# Altium PCB pcb.PcbDoc
Units mm, origin at the board's own origin, x right, y up, seen from the top; angles counter-clockwise.
Board outline 42.29 x 42.42 mm, 2 copper layers (Top Layer, Bottom Layer); 59 components, 70 nets, 242 pads, 112 vias.
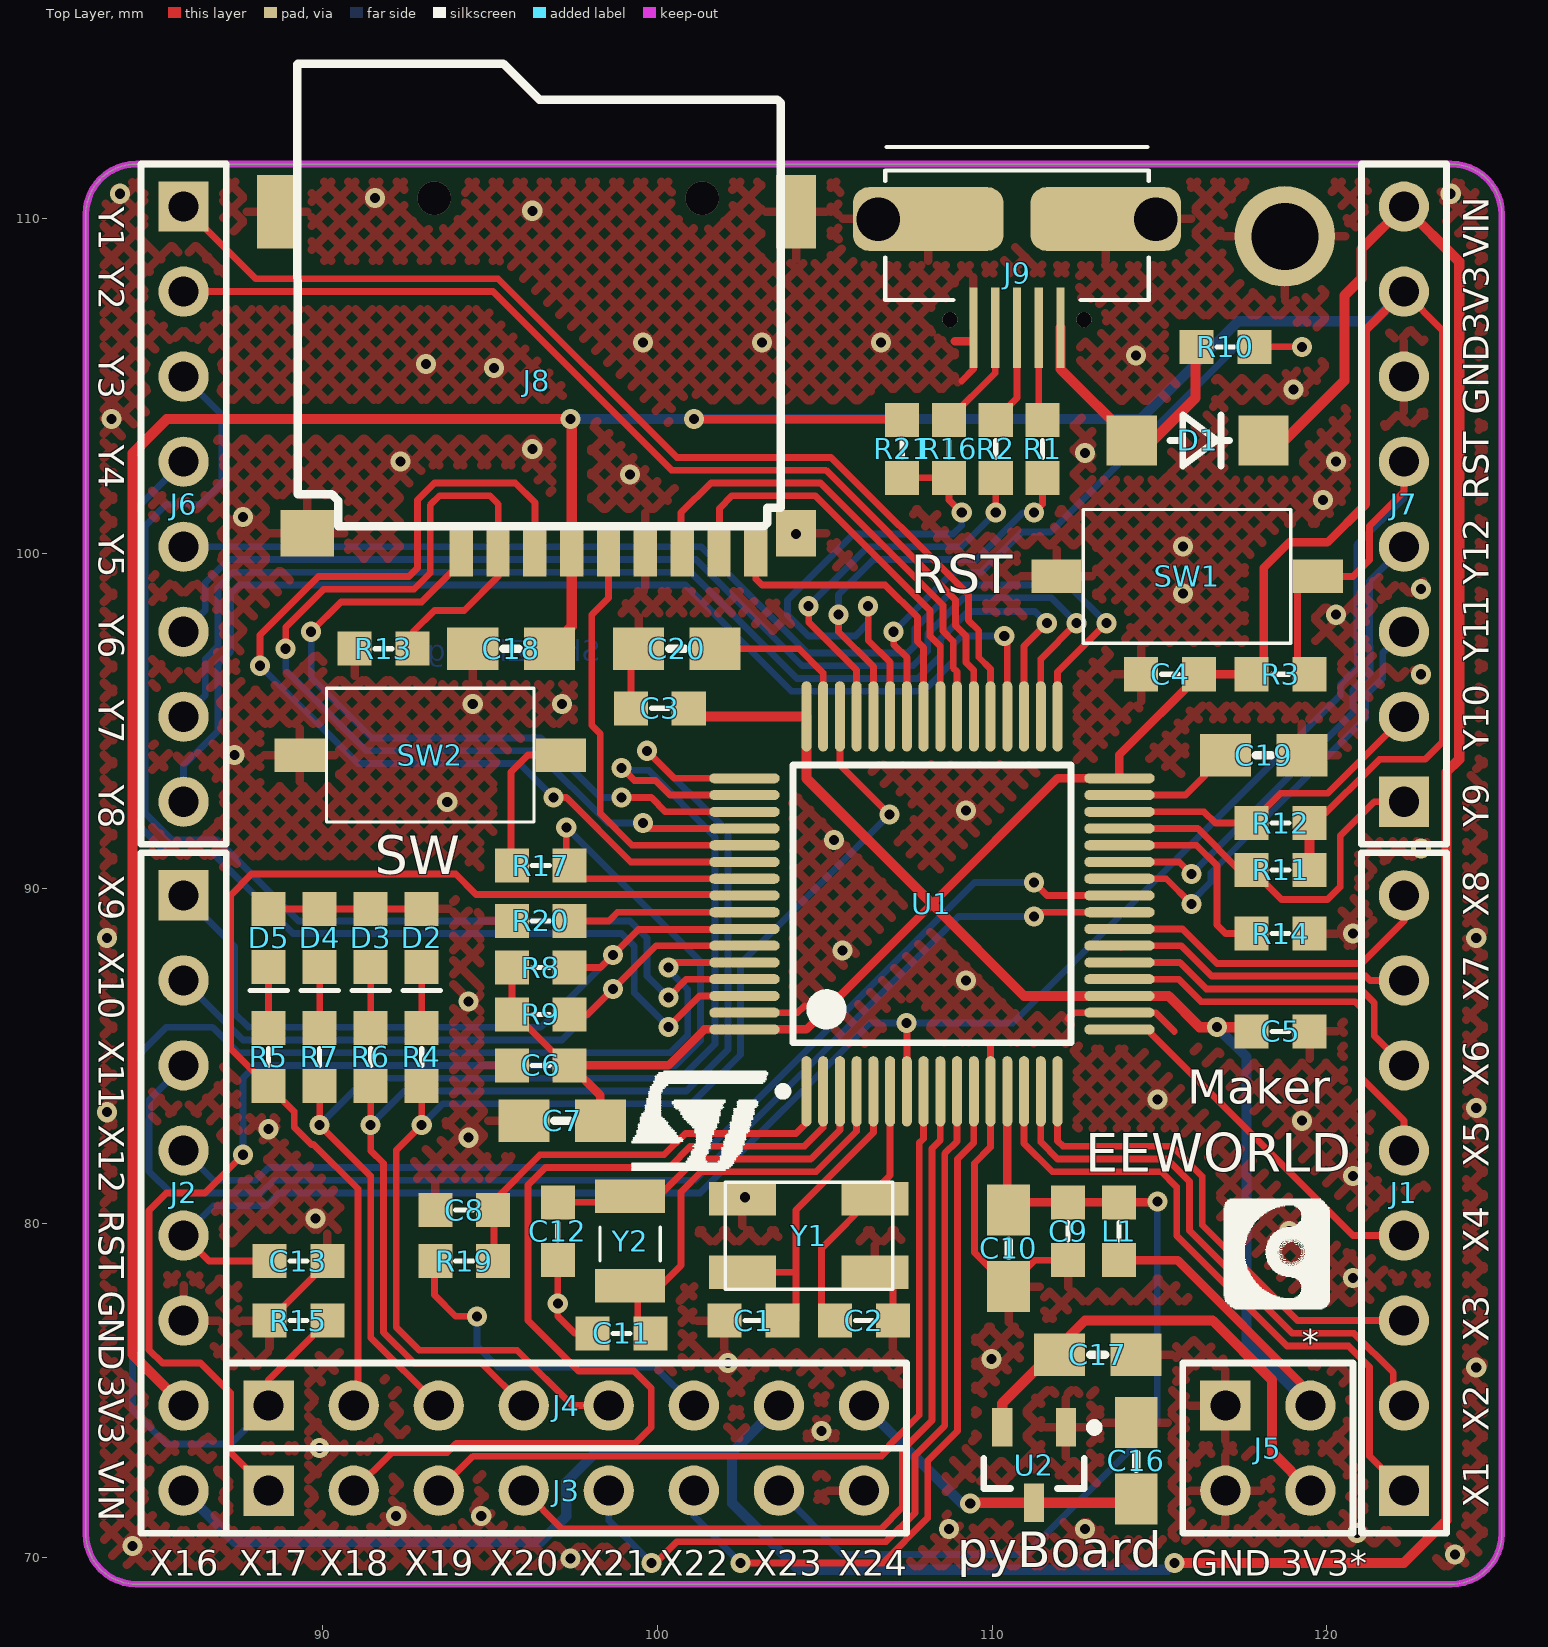
[diagram p0: Top Layer view]
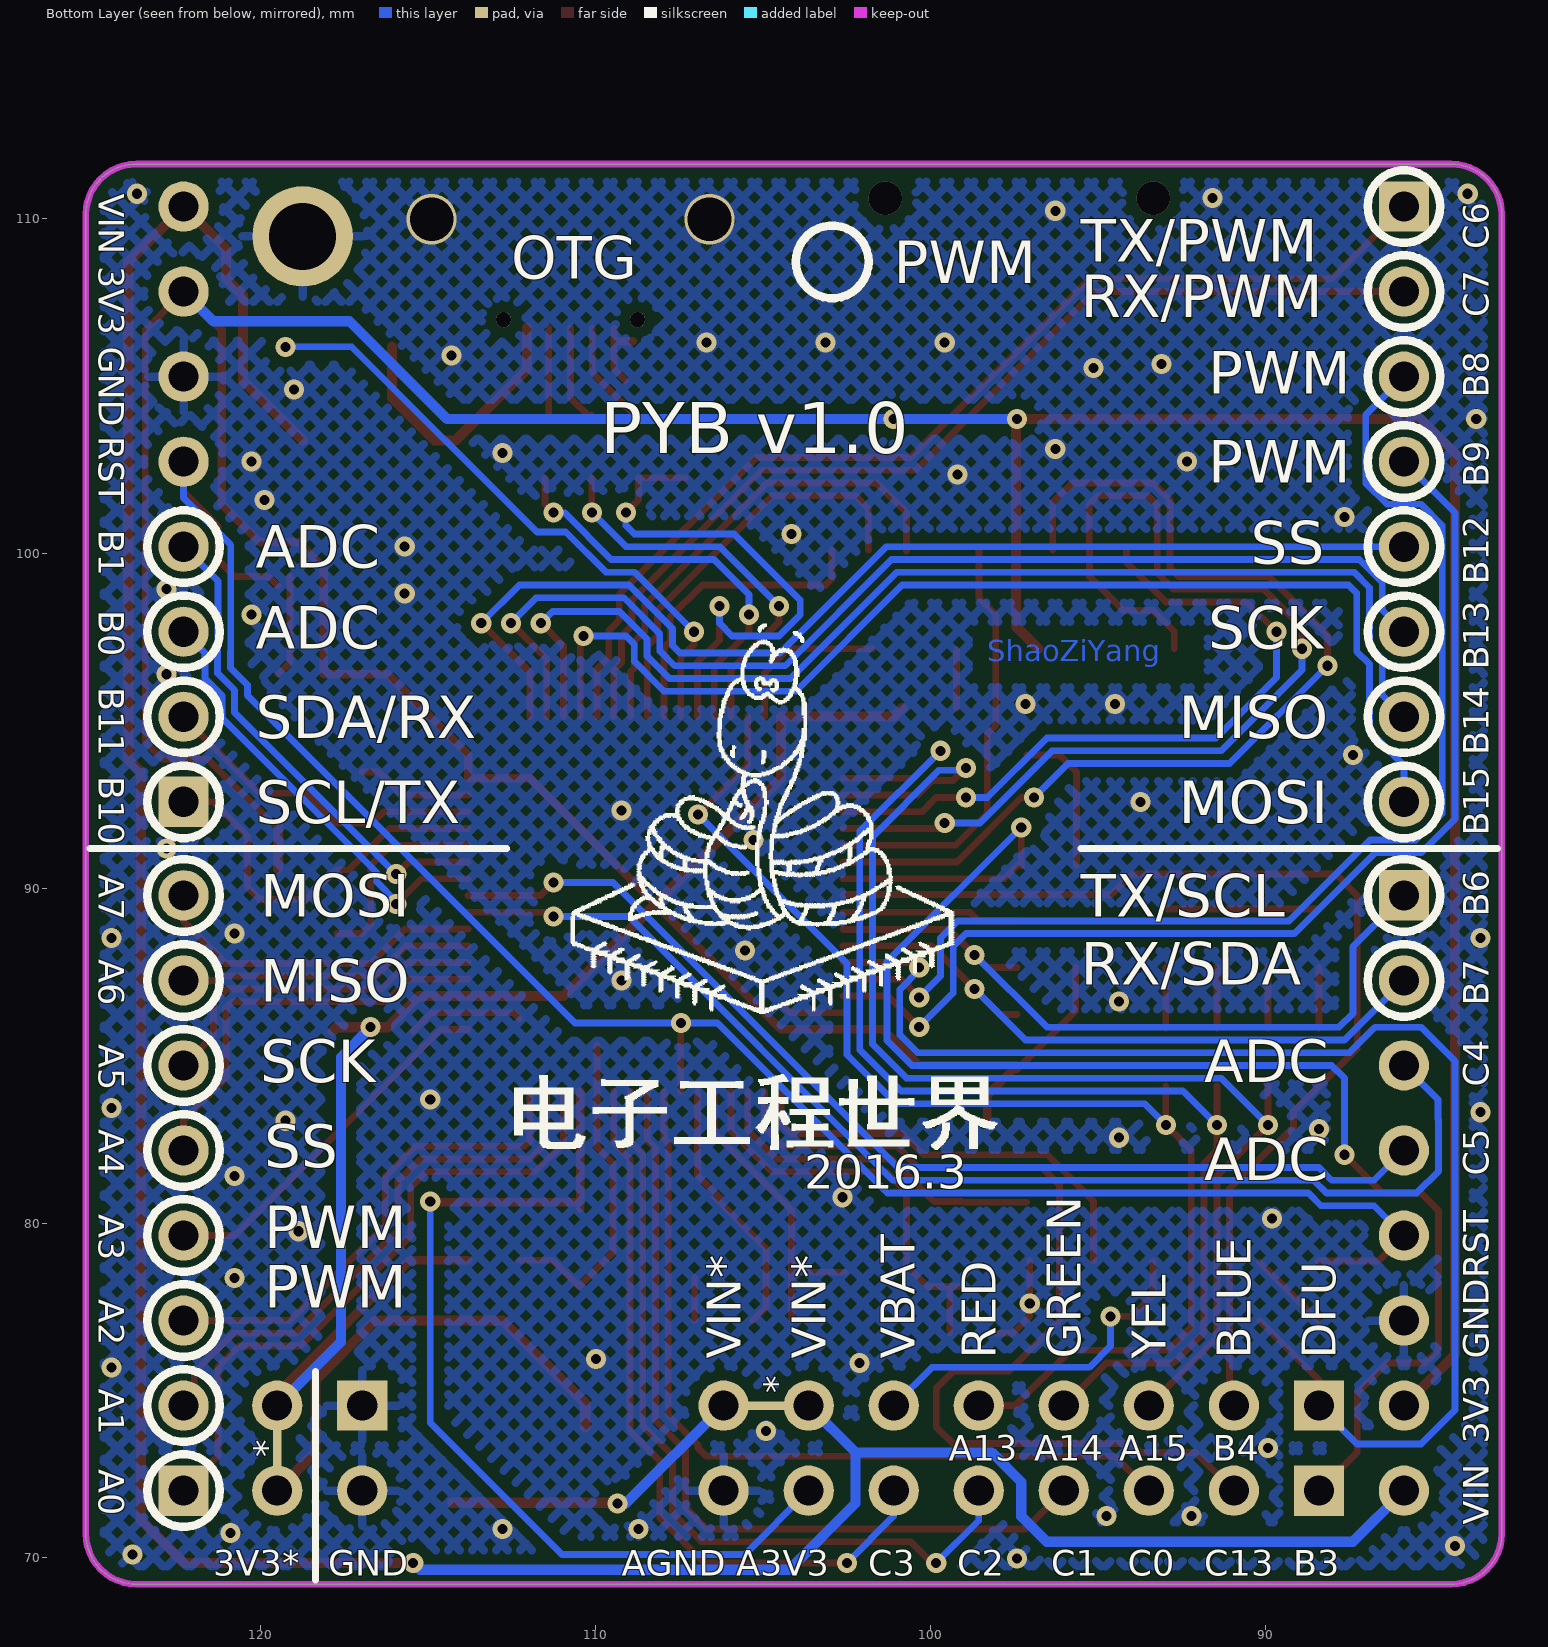
[diagram p1: Bottom Layer view, seen from below]

## Layer stack, top to bottom
Top Layer: signal copper 0.0356
Dielectric: dielectric 0.32, FR-4, Dk 4.8
Bottom Layer: signal copper 0.0356

## Board outline
82.931,70.726 82.931,110.122 cw(c84.442,110.122) 84.442,111.633 123.711,111.633 cw(c123.711,110.122) 125.222,110.122 125.222,70.726 cw(c123.711,70.726) 123.711,69.215 84.442,69.215 cw(c84.442,70.726)

## Design rules (kind name [scope] priority, off if disabled: settings)
Clearance Clearance_polygon [InPolygon] p1: gap=0.305
Clearance [All] p2: gap=0.178
ComponentClearance [All] p1 off: gap=0.254 collisioncheckmode=3 verticalgap=0.254 showdistances=FALSE
HoleSize [All] p1: absolutevalues=TRUE maxlimit=5 minlimit=0.025 maxpercent=80.000 minpercent=20.000
PolygonConnect PolygonConnect_via [IsVia] p1: connectstyle=Direct reliefconductorwidth=0.254 reliefentries=4 polygonreliefangle="90 Angle"
PolygonConnect [All] p2: connectstyle=Relief reliefconductorwidth=0.254 reliefentries=4 polygonreliefangle="90 Angle"
RoutingVias [All] p1: holewidth=0.711 width=1.27 viastyle="Through Hole" minholewidth=0.3 minwidth=0.6 maxholewidth=1.27 maxwidth=3.81
SilkscreenOverComponentPads SilkToSolderMaskClearance [IsPad] p1: minsilkscreentomaskgap=0.254
SolderMaskExpansion [All] p1: expansion=0.102
Width [All] p1: maxlimit=0.508 minlimit=0.178 preferedwidth=0.203
25 further rules are at their usual default settings.

## Components (designator, comment, footprint, x,y, rotation, side; value= is the part's Value field where it differs from the comment)
C1 "18p" SMD0603 102.87,77.089 r0 top
C2 "18p" SMD0603 106.172,77.089 r180 top
C3 "104" SMD0603 100.076,95.377 r0 top
C4 "104" SMD0603 115.316,96.393 r0 top
C5 "104" SMD0603 118.618,85.725 r180 top
C6 "104" SMD0603 96.52,84.709 r0 top
C7 "2u2" SMD0805 96.012,83.058 r0 top
C8 "104" SMD0603 94.234,80.391 r0 top
C9 "104" SMD0603 112.268,79.756 r90 top
C10 "2u2" SMD0805 110.49,78.105 r90 top
C11 "2.2p" SMD0603 98.933,76.708 r0 top
C12 "2.2p" SMD0603 97.028,79.756 r90 top
C13 "104" SMD0603 89.281,78.867 r180 top
C16 "2u2" SMD0805 114.3,74.041 r270 top
C17 "2u2" SMD0805 114.3,76.073 r180 top
C18 "2u2" SMD0805 94.488,97.155 r0 top
C19 "2u2" SMD0805 119.253,93.98 r180 top
C20 "2u2" SMD0805 99.441,97.155 r0 top
D1 "SS14" "SS24 - small" 114.173,103.378 r0 top
D2 "LED RED" LED0603 92.964,88.519 r90 top
D3 "LED GREEN" LED0603 91.44,88.519 r90 top
D4 "LED Yellow" LED0603 89.916,88.519 r90 top
D5 "LED Blue" LED0603 88.392,88.519 r90 top
J1 "Header 8-X1X8" HDR1X8 122.301,72.009 r90 top
J2 "Header 8-X9X16" HDR1X8 85.852,89.789 r270 top
J3 "Header 8-X17X24" HDR1X8 88.392,72.009 r0 top
J4 "" HDR1X8 88.392,74.549 r0 top
J5 "Header 2X2-P9P10" HDR2X2 116.967,74.549 r270 top
J6 "Header 8-Y1Y8" HDR1X8 85.852,110.363 r270 top
J7 "Header 8-Y9Y16" HDR1X8 122.301,92.583 r90 top
J8 "microSD PUSH-PULL" MICROSD-1 96.393,105.156 r90 top (schematic designator J2)
J9 "macro USB" MicroUSB 110.744,112.141 r90 top (schematic designator J1)
L1 "1uH" SMD0603 113.792,79.756 r270 top
R1 "22R" SMD0603 111.506,103.124 r90 top
R2 "22R" SMD0603 110.109,103.124 r90 top
R3 "10k" SMD0603 118.618,96.393 r180 top
R4 "560" SMD0603 92.964,84.963 r90 top
R5 "560" SMD0603 88.392,84.963 r90 top
R6 "560" SMD0603 91.44,84.963 r90 top
R7 "560" SMD0603 89.916,84.963 r90 top
R8 "10k" SMD0603 96.52,87.63 r0 top
R9 "10k" SMD0603 96.52,86.233 r0 top
R10 "560" SMD0603 116.967,106.172 r180 top
R11 "10k" SMD0603 118.618,90.551 r180 top
R12 "10k" SMD0603 118.618,91.948 r180 top
R13 "10M" SMD0603 91.821,97.155 r180 top
R14 "10k" SMD0603 118.618,88.646 r0 top
R15 "100k" SMD0603 89.281,77.089 r0 top
R16 "560" SMD0603 108.712,103.124 r90 top
R17 "10k" SMD0603 96.52,90.678 r0 top
R19 "220" SMD0603 94.234,78.867 r180 top
R20 "10k" SMD0603 96.52,89.027 r180 top
R21 "100k" SMD0603 107.315,103.124 r270 top
SW1 "RST" "SW 3X6" 115.824,99.314 r0 top
SW2 "USR" "SW 3X6" 93.218,93.98 r0 top
U1 "STM32F405RGT6" LQFP64_M 108.204,89.535 r90 top
U2 "XC6206P332MR" SOT-23_N 111.252,72.771 r270 top
Y1 "8M" SMD5032 104.521,79.629 r180 top
Y2 "32K" TXC_9H03200019 99.187,79.375 r90 top

## Footprints (in the part's own frame and the unit in brackets; to place one, negate y for a bottom-side part, rotate by r counter-clockwise, add the part's x,y. Pads: shape width x height; smd on the part's side, far side on the other; paste and mask are expansions set on the pad)
HDR1X8 [mm] "Connector; Header; 8 Position"
  rect 1.5x1.5 hole 0.9: 1(0,0)
  round 1.5 hole 0.9: 2(2.54,0) 3(5.08,0) 4(7.62,0) 5(10.16,0) 6(12.7,0) 7(15.24,0) 8(17.78,0)
  silkscreen extent -1.27,-1.27 19.05,1.27
HDR2X2 [mm] "Connector; Header; 2x2 Position"
  rect 1.5x1.5 hole 0.9: 1(0,0)
  round 1.5 hole 0.9: 2(0,2.54) 3(2.54,0) 4(2.54,2.54)
  silkscreen extent -1.27,-1.27 3.81,3.81
LED0603 [mil]
  rect 40x40 smd: 1(-34,0) 2(34,0)
  silkscreen extent -62,-22 -62,22
LQFP64_M [mm] "Thin QFP, 64-Leads, Body 10x10mm, Pitch 0.5mm, IPC Low Density"
  oval 2.1x0.3 smd: 1(-5.6,3.75) 2(-5.6,3.25) 3(-5.6,2.75) 4(-5.6,2.25) 5(-5.6,1.75) 6(-5.6,1.25) 7(-5.6,0.75) 8(-5.6,0.25) 9(-5.6,-0.25) 10(-5.6,-0.75) 11(-5.6,-1.25) 12(-5.6,-1.75) 13(-5.6,-2.25) 14(-5.6,-2.75) 15(-5.6,-3.25) 16(-5.6,-3.75) 33(5.6,-3.75) 34(5.6,-3.25) 35(5.6,-2.75) 36(5.6,-2.25) 37(5.6,-1.75) 38(5.6,-1.25) 39(5.6,-0.75) 40(5.6,-0.25) 41(5.6,0.25) 42(5.6,0.75) 43(5.6,1.25) 44(5.6,1.75) 45(5.6,2.25) 46(5.6,2.75) 47(5.6,3.25) 48(5.6,3.75)
  oval 0.3x2.1 smd: 17(-3.75,-5.6) 18(-3.25,-5.6) 19(-2.75,-5.6) 20(-2.25,-5.6) 21(-1.75,-5.6) 22(-1.25,-5.6) 23(-0.75,-5.6) 24(-0.25,-5.6) 25(0.25,-5.6) 26(0.75,-5.6) 27(1.25,-5.6) 28(1.75,-5.6) 29(2.25,-5.6) 30(2.75,-5.6) 31(3.25,-5.6) 32(3.75,-5.6) 49(3.75,5.6) 50(3.25,5.6) 51(2.75,5.6) 52(2.25,5.6) 53(1.75,5.6) 54(1.25,5.6) 55(0.75,5.6) 56(0.25,5.6) 57(-0.25,5.6) 58(-0.75,5.6) 59(-1.25,5.6) 60(-1.75,5.6) 61(-2.25,5.6) 62(-2.75,5.6) 63(-3.25,5.6) 64(-3.75,5.6)
  silkscreen extent -5.72,-4.15 4.15,4.57, body extent -5,-5 5,5, height 1.6
MICROSD-1 [mm]
  rect 1.6x0.7 smd: 1(-5.05,2.25) 2(-5.05,1.15) 3(-5.05,0.05) 4(-5.05,-1.05) 5(-5.05,-2.15) 6(-5.05,-3.25) 7(-5.05,-4.35) 8(-5.05,-5.45) 9(-5.05,-6.55)
  rect 1.4x1.2 smd: GP1(-4.55,-7.75)
  rect 2.2x1.2 smd: GP2(5.05,-7.75) GP3(5.05,7.75)
  rect 1.4x1.6 smd: GP4(-4.55,6.85)
  silkscreen extent -4.35,-7.29 9.47,7.15
MicroUSB [mm]
  rect 2.4x0.25 smd: 1(-5.4,-1.3) 2(-5.4,-0.65) 3(-5.4,0) 4(-5.4,0.65) 5(-5.4,1.3)
  rrect50% 1.9x4.5 smd: 6(-2.15,2.65) 7(-2.15,-2.65)
  round 0.457 hole 0.457 unplated: ""(-5.159,-2) ""(-5.159,2)
  silkscreen extent -4.57,-3.94 0,3.94
SMD0603 [mil]
  rect 40x40 smd: 1(-34,0) 2(34,0)
  silkscreen extent -10,0 10,0
SMD0805 [mil]
  rect 60x50 smd: 1(0,0) 2(90,0)
  silkscreen extent 36,0 54,0
SMD5032 [mm]
  rect 2x1 smd: 1(-1.98,-1.096) 2(1.98,-1.096) 3(1.98,1.096) 4(-1.98,1.096)
  silkscreen extent -2.51,-1.6 2.49,1.6, body extent -2.41,-1.52 2.41,1.52, height 0.8
SOT-23_N [mm] "SOT23, 3-Leads, Body 2.9x1.3mm, Pitch 0.95mm, Lead Span 2.5mm, IPC Medium Density"
  rect 1.15x0.6 smd: 1(-1.125,0.95) 2(-1.125,-0.95) 3(1.125,0)
  silkscreen extent -1.25,-1.5 0.7,1.93, body extent -0.7,-1.5 0.7,1.5, height 1.1
"SS24 - small" [mm]
  rect 1.5x1.5 smd: 1(0,0) 2(3.937,0)
  silkscreen extent 1.14,-0.76 2.92,0.76, body extent -0.64,-0.89 4.57,0.89, height 3
"SW 3X6" [mm]
  rect 1.5x1 smd: 1(-3.9,0) 2(3.9,0)
  silkscreen extent -3.1,-2 3.1,2
TXC_9H03200019 [mm]
  rect 1x2.1 smd: 1(-1.25,0) 2(1.425,0)
  silkscreen extent -0.5,-0.9 0.5,0.9, body extent -1.73,-0.85 1.73,0.85, height 0.8

## Part data
C1 C2 C3 C4 C5 C6 C7 C8 C9 C10 C11 C12 C13 C16 C17 C18 C19 C20: library part Cap
D1: library part Diode
D2: library part LED-RED, "红?"
D3: library part LED-GREEN, "绿?"
D4: library part LED-YELLOW, "黄?"
D5: library part LED-BLUE, "蓝?"
J1 J2 J3 J4 J6 J7: library part "Header 8", "Header, 8-Pin"
J5: library part "Header 2X2", "Header, 2-Pin, Dual row"
J9: "USB 2.0, Right Angle, SMT, B Type, Receptacle, 5 Position, Black"
L1: library part Inductor
R1 R2 R3 R4 R5 R6 R7 R8 R9 R10 R11 R12 R13 R14 R15 R16 R17 R19 R20 R21: library part Res
SW1 SW2: library part SW-PB, "Switch"
U2: library part XC6206
Y1: library part XTAL_SMD
Y2: library part XTAL

## Free pads (board coordinates)
  rect 2.54x0.254 smd far side: 0(104.902,74.549)
  rect 0.254x2.54 smd far side: 0(119.507,73.279)
  round 3 hole 2: 1(118.745,109.474)

## Via types
v1: diameter 0.6, hole 0.3, Top Layer to Bottom Layer, 108 vias
v2: diameter 1, hole 1, Top Layer to Bottom Layer, 2 vias
v3: diameter 1.5, hole 1.3, Top Layer to Bottom Layer, 2 vias

## Nets (pads, with @x,y where several pads share a name; then routed paths per layer and width w, separated by ;. In a path a pad name is that pad's centre, name@x,y a point inside that pad or via, vN(x,y) a via of type N, cw(c..) or ccw(c..) an arc to the next point about the centre after c; other vN are vias at no path point)
3V3: C3.2 C4.2 C5.2 C6.2 C7.2 C17.2 C18.2 J2.7 J5.2 J5.4 J7.7 J8.4 L1.2 pad.0@119.507,73.279 R3.2 R8.1 R9.1 R11.1 R12.1 R21.1 U1.19 U1.32 U1.48 U1.64 U2.2 | length 204.8
  Top Layer w0.203: R8.1 95.656,86.335 C6.2@97.409,84.582 ; R12.1 119.665,91.948 121.57,93.853 122.936,93.853 123.444,94.361 123.444,106.68 J7.7
  Top Layer w0.254: C7.2 98.298,83.82 97.409,84.709 100.33,84.709 101.406,85.785 U1.64 104.454,85.785 108.204,89.535 111.954,93.285 U1.32 113.804,93.992 116.205,96.393 118.11,96.393 118.11,99.568 118.872,100.33 120.015,100.33 121.158,101.473 121.158,106.68 J7.7 ; v1(101.092,104.013) R21.1@107.315,104.013 ; L1.2 115.545,78.892 119.507,74.93 J5.2
  Top Layer w0.305: J2.7 84.328,76.073 84.328,102.997 85.344,104.013 v1(97.409,104.013) ; C18.2 97.443,97.824 J8.4 v1@97.443,103.979 ; C3.2@100.838,95.377 101.08,95.135 U1.48 104.454,93.285 108.204,89.535 110.954,86.785 U1.19 115.272,86.785 116.205,85.852 v1(116.713,85.852) 117.729,85.852 C5.2@117.856,85.725 ; U2.2 110.302,74.615 112.776,77.089 116.586,77.089 118.364,75.311 118.364,73.152 J5.4 ; R11.1@119.482,90.576 R12.1
  Bottom Layer w0.305: v1(97.409,104.013) v1(101.092,104.013) 114.427,104.013 117.348,106.934 121.412,106.934 J7.7 ; v1(116.713,85.852) 117.602,84.963 117.602,76.454 J5.2
A3V3: C9.2 C10.2 J3.7 L1.1 U1.13 | length 28.3
  Top Layer w0.254: C10.2@110.454,80.427 U1.13 ; C10.2@110.515,80.62 v1@114.935,80.62
  Bottom Layer w0.203: J3.7 105.537,70.104 110.998,70.104 114.935,74.041 v1(114.935,80.645)
BOOT0-P1: J4.1 R15.2 U1.60 | length 40.8
  Top Layer w0.203: J4.1 88.392,75.311 R15.2@90.17,77.089 ; v1(100.33,87.63) 100.485,87.785 U1.60
  Bottom Layer w0.203: J4.1 87.249,73.406 85.344,73.406 84.328,74.422 84.328,84.836 85.344,85.852 86.71,85.852 87.472,85.09 100.387,85.09 100.909,85.612 100.909,86.981 100.33,87.56 v1(100.33,87.63)
DM: J9.2 R1.2 | length 2.8
  Top Layer w0.203: J9.2 111.394,104.125 R1.2@111.506,104.013
DP: J9.3 R2.2 | length 3.1
  Top Layer w0.203: R2.2 R2.2@110.109,104.14 ; R2.2@110.109,104.013 110.744,104.648 J9.3
GND: C1.1 C2.1 C3.1 C4.1 C5.1 C6.1 C7.1 C8.1 C9.1 C10.1 C11.1 C12.1 C13.1 C16.1 C17.1 C18.1 C19.1 C20.1 D2.2 D3.2 D4.2 D5.2 J2.6 J3.8 J5.1 J5.3 J7.6 J8.6 J8.GP1 J8.GP2 J8.GP3 J8.GP4 J9.5 J9.6 J9.7 pad.1 R13.2 R14.2 R15.1 R20.2 SW1.1 SW2.1 U1.12 U1.18 U1.63 U2.1 Y1.2 Y1.4 | length 30.4
  Top Layer w0.203: D5.2 D2.2@92.939,89.383 ; R15.1 C13.1@90.17,78.842 ; C12.1 97.028,77.216 97.536,76.708 C11.1@98.044,76.708 ; C3.1 C20.1@99.212,97.13 ; U1.63 104.192,86.285 104.394,86.487 ; C2.1 Y1.4@107.036,78.384 ; 109.093,105.156 109.444,105.507 J9.5 ; 109.954,85.316 U1.12 109.954,82.268 109.474,81.788 109.474,79.121 C10.1 111.277,78.892 C9.1 ; 112.268,86.106 112.447,86.285 U1.18 114.883,86.285 115.443,85.725
  Top Layer w0.254: 108.887,106.337 109.309,106.337
  other v1: 97.409,69.977 123.825,70.104 84.328,70.358 120.904,70.739 108.712,70.866 112.776,70.866 92.202,71.247 94.742,71.247 89.916,73.279 104.902,73.787 124.46,75.692 102.108,75.819 109.982,75.946 97.028,77.597 120.777,78.359 118.872,79.756 89.789,80.137 102.616,80.772 120.777,81.407 94.361,82.55 88.392,82.804 119.253,83.058 83.566,83.312 124.46,83.439 114.935,83.693 94.361,86.614 109.22,87.249 105.537,88.138 83.566,88.519 124.46,88.519 120.777,88.646 122.809,91.186 105.283,91.44 109.22,92.329 93.726,92.583 87.376,93.98 94.488,95.504 97.155,95.504 122.809,96.393 120.269,98.171 115.697,98.806 122.809,98.933 115.697,100.203 104.14,100.584 87.63,101.092 119.888,101.6 99.187,102.362 92.329,102.743 120.269,102.743 112.776,102.997 96.266,103.124 83.693,104.013 118.999,104.902 95.123,105.537 93.091,105.664 114.3,105.918 99.568,106.299 103.124,106.299 106.68,106.299 96.266,110.236 91.567,110.617 83.947,110.744 123.698,110.744
  other v3: 106.594,109.982 114.894,109.982
ID: J9.4 R16.2 | length 3.3
  Top Layer w0.203: R16.2@108.712,104.013 110.094,105.395 J9.4
NetC1_2: C1.2 U1.5 Y1.3 | length 9.4
  Top Layer w0.203: Y1.3 104.093,78.533 ; C1.2@104.14,77.089 104.14,80.391 106.454,82.705 U1.5
NetC2_2: C2.2 U1.6 Y1.1 | length 7.9
  Top Layer w0.203: C2.2 104.902,77.495 104.902,79.248 Y1.1@106.426,80.772 ; Y1.1@106.299,80.772 106.954,81.427 U1.6
NetC11_2: C11.2 U1.4 Y2.1 | length 13
  Top Layer w0.203: Y2.1@99.06,78.105 100.076,78.105 100.711,78.74 100.711,80.934 101.311,81.534 104.744,81.534 105.954,82.744 U1.4 ; Y2.1@99.06,78.125 99.416,78.08 C11.2@99.416,76.708
NetC12_2: C12.2 U1.3 Y2.2 | length 10.3
  Top Layer w0.203: C12.2@97.13,80.625 Y2.2@99.04,80.625 ; Y2.2@99.06,80.645 99.884,80.645 101.154,81.915 104.586,81.915 105.454,82.783 U1.3
NetC19_2: C19.2 U1.31 | length 3.4
  Top Layer w0.203: U1.31 115.772,92.785 116.459,93.472 C19.2@116.967,93.472
NetC20_2: C20.2 U1.47 | length 4.8
  Top Layer w0.203: C20.2 104.236,97.155 104.954,96.437 U1.47
NetD2_1: D2.1 R4.2 | length 1.8
  Top Layer w0.203: R4.2 D2.1@92.964,87.63
NetD3_1: D3.1 R6.2 | length 1.8
  Top Layer w0.203: R6.2 D3.1@91.44,87.63
NetD4_1: D4.1 R7.2 | length 1.8
  Top Layer w0.203: R7.2 D4.1@89.916,87.63
NetD5_1: D5.1 R5.2 | length 1.8
  Top Layer w0.203: R5.2 D5.1@88.392,87.63
NetR17_1: R17.1 SW2.2 | length 4.5
  Top Layer w0.203: R17.1@95.631,90.678 95.631,93.472 96.139,93.98 SW2.2
PA0-X1: J1.1 U1.14 | length 19.6
  Top Layer w0.203: U1.14 110.954,82.379 111.799,81.534 115.062,81.534 115.514,81.082 115.514,79.623 118.81,76.327 120.65,76.327 121.272,75.705 121.272,73.038 J1.1
PA1-X2: J1.2 U1.15 | length 16.9
  Top Layer w0.203: U1.15 111.454,82.418 111.957,81.915 115.22,81.915 115.895,81.239 115.895,79.781 118.968,76.708 120.808,76.708 121.983,75.532 121.983,74.897 122.301,74.58 J1.2
PA2-X3: J1.3 U1.16 | length 14.9
  Top Layer w0.203: U1.16 111.954,82.457 112.115,82.296 115.378,82.296 116.276,81.397 116.276,79.939 119.126,77.089 J1.3
PA3-X4: J1.4 U1.17 | length 11
  Top Layer w0.203: U1.17 114.621,85.785 120.777,79.629 J1.4
PA4-X5: J1.5 U1.20 | length 12.4
  Top Layer w0.203: U1.20 115.569,87.285 116.24,86.614 120.842,86.614 121.031,86.425 121.031,84.328 122.301,83.058 J1.5
PA5-X6: J1.6 U1.21 | length 10.3
  Top Layer w0.203: U1.21 115.607,87.785 116.397,86.995 121,86.995 121.412,86.583 121.412,85.598 J1.6
PA6-X7: J1.7 U1.22 | length 9
  Top Layer w0.203: U1.22@113.849,88.24 U1.22 115.646,88.285 116.555,87.376 121.158,87.376 121.285,87.249 J1.7
PA7-X8: J1.8 U1.23 | length 10.2
  Top Layer w0.203: U1.23 115.685,88.785 116.713,87.757 121.031,87.757 122.301,89.027 J1.8
PA8-SDIO_SW: J8.9 U1.41 | length 9.2
  Top Layer w0.203: J8.9 102.943,99.241 103.124,99.06 106.807,99.06 107.767,98.1 107.767,97.372 107.954,97.186 U1.41
PA9-VSUB: R10.1 U1.42 | length 19.8
  Top Layer w0.203: v1(107.061,97.663) 107.061,97.282 107.454,96.889 U1.42 ; R10.1 v1(119.253,106.172)
  Bottom Layer w0.203: v1(107.061,97.663) 108.839,99.441 109.689,99.441 110.888,100.64 111.746,100.64 117.278,106.172 v1(119.253,106.172)
PA10-ID: R16.1 R21.2 U1.43 | length 16.4
  Top Layer w0.203: v1(106.299,98.425) 106.299,97.409 106.954,96.754 U1.43 ; R21.2 R16.1@108.687,102.26 ; R16.1 108.712,101.6 v1(109.093,101.219)
  Bottom Layer w0.203: v1(106.299,98.425) 106.299,97.917 105.918,97.536 104.517,97.536 103.886,98.167 103.886,98.609 105.861,100.584 108.839,100.584 109.093,100.838 v1(109.093,101.219)
PA11-DM: R1.1 U1.44 | length 12.1
  Top Layer w0.203: v1(105.41,98.171) 105.41,97.663 106.454,96.619 U1.44 ; v1(111.252,101.219) 111.506,101.473 R1.1
  Bottom Layer w0.203: v1(105.41,98.171) 105.41,98.775 106.457,99.822 109.531,99.822 110.928,101.219 v1(111.252,101.219)
PA12-DP: R2.1 U1.45 | length 11.7
  Top Layer w0.203: v1(104.521,98.425) 104.521,97.948 105.954,96.515 U1.45 ; v1(110.109,101.219) R2.1
  Bottom Layer w0.203: v1(104.521,98.425) 106.299,100.203 109.093,100.203 v1(110.109,101.219)
PA13-RED-P5: J4.5 R4.1 U1.46 | length 37.8
  Top Layer w0.203: R4.1 v1(92.964,82.931) 92.202,82.169 92.202,76.897 92.899,76.2 95.817,76.2 97.468,74.549 J4.5 ; U1.46 105.454,93.682 v1(106.934,92.202)
  Bottom Layer w0.203: v1(92.964,82.931) 93.599,83.566 101.027,83.566 102.489,85.028 102.489,87.757 v1(106.934,92.202)
PA14-GRN-P4: J4.4 R6.1 U1.49 | length 37.4
  Top Layer w0.203: R6.1 v1(91.44,82.931) 91.44,82.169 91.821,81.788 91.821,76.739 92.741,75.819 94.742,75.819 J4.4 ; v1(99.695,94.107) 100.517,93.285 U1.49
  Bottom Layer w0.203: v1(91.44,82.931) 92.456,83.947 100.869,83.947 102.108,85.186 102.108,91.694 v1(99.695,94.107)
PA15-YEL-P3: J4.3 R7.1 U1.50 | length 37.7
  Top Layer w0.203: R7.1 v1(89.916,82.931) 91.44,81.407 91.44,76.581 J4.3 ; v1(98.933,93.599) 99.314,93.218 99.949,93.218 100.382,92.785 U1.50
  Bottom Layer w0.203: v1(89.916,82.931) 91.313,84.328 100.711,84.328 101.727,85.344 101.727,91.536 99.736,93.528 99.004,93.528 v1(98.933,93.599)
PB0-Y11: J7.3 U1.26 | length 13.2
  Top Layer w0.203: U1.26 115.201,90.285 v1(115.951,89.535)
  Bottom Layer w0.203: v1(115.951,89.535) 115.951,89.605 116.53,90.184 116.53,90.465 121.158,95.092 121.158,95.758 121.666,96.266 121.666,97.028 J7.3
PB1-Y12: J7.4 U1.27 | length 14.7
  Top Layer w0.203: U1.27 115.59,90.785 v1(115.951,90.424)
  Bottom Layer w0.203: v1(115.951,90.424) 120.777,95.25 120.777,95.916 121.285,96.424 121.285,97.223 121.272,97.237 121.272,99.174 J7.4
PB2-BOOT1-MMA-INT: R14.1 U1.28 | length 6.1
  Top Layer w0.203: U1.28 116.106,91.285 116.713,90.678 116.713,88.9 116.967,88.646 R14.1@117.729,88.646
PB3-SW-X17: J3.1 R17.2 U1.55 | length 45
  Top Layer w0.203: v1(87.63,82.042) 86.487,80.899 85.344,80.899 84.823,80.378 84.823,76.213 85.217,75.819 86.36,75.819 87.249,74.93 87.249,73.152 J3.1 ; R17.2@97.282,90.678 v1(97.282,91.821) ; R17.2@97.409,90.678 97.802,90.285 U1.55
  Bottom Layer w0.203: v1(87.63,82.042) 87.63,84.328 88.011,84.709 100.545,84.709 101.29,85.454 101.29,87.813 v1(97.282,91.821)
PB4-BLU-P2: J4.2 R5.1 U1.56 | length 32.8
  Top Layer w0.203: R5.1@88.392,84.074 87.249,85.217 87.249,89.789 87.884,90.424 93.98,90.424 94.59,89.814 102.575,89.814 U1.56 ; R5.1 89.154,83.337 89.154,82.874 89.676,82.352 89.733,82.352 91.059,81.026 91.059,74.676 J4.2
PB5-MMA_AVDD: R20.1 U1.57 | length 5.3
  Top Layer w0.203: R20.1@97.409,89.027 98.552,89.027 98.81,89.285 U1.57
PB6-SCL-X9: J2.1 R8.2 U1.58 | length 22.2
  Top Layer w0.203: R8.2@97.409,87.63 98.298,87.63 v1(98.679,88.011) 99.441,88.773 102.592,88.773 U1.58
  Bottom Layer w0.203: J2.1 87.376,88.265 87.376,86.264 87.788,85.852 96.52,85.852 v1(98.679,88.011)
PB7-SDA-X10: J2.2 R9.2 U1.59 | length 20.2
  Top Layer w0.203: R9.2@97.409,86.233 97.917,86.233 v1(98.679,86.995) 99.969,88.285 U1.59
  Bottom Layer w0.203: J2.2 87.63,85.471 97.155,85.471 v1(98.679,86.995)
PB8-Y3: J6.3 U1.61 | length 36.1
  Top Layer w0.203: v1(100.33,86.741) 100.874,87.285 U1.61
  Bottom Layer w0.203: J6.3 86.995,104.14 86.995,102.108 86.36,101.473 85.344,101.473 84.709,100.838 84.709,92.233 85.502,91.44 86.868,91.44 89.281,89.027 99.187,89.027 99.695,88.519 99.695,87.376 v1(100.33,86.741)
PB9-Y4: J6.4 U1.62 | length 33.4
  Top Layer w0.203: v1(100.33,85.852) 101.263,86.785 U1.62
  Bottom Layer w0.203: J6.4 84.328,101.219 84.328,92.075 85.344,91.059 86.71,91.059 89.123,88.646 98.933,88.646 99.314,88.265 99.314,86.868 v1(100.33,85.852)
PB10-Y9: J7.1 R11.2 U1.29 | length 11.5
  Top Layer w0.203: U1.29 116.145,91.785 117.379,90.551 R11.2@117.729,90.551 ; R11.2 118.643,89.662 120.015,89.662 120.396,90.043 120.396,91.567 121.412,92.583 J7.1
PB11-Y10: J7.2 R12.2 U1.30 | length 10
  Top Layer w0.203: U1.30 116.332,92.285 116.669,91.948 117.729,91.948 118.618,92.837 120.015,92.837 J7.2
PB12-Y5: J6.5 U1.33 | length 33.9
  Top Layer w0.203: U1.33 111.954,96.46 v1(113.411,97.917)
  Bottom Layer w0.203: J6.5 101.311,100.203 104.486,97.028 107.477,97.028 107.696,97.247 107.696,97.759 108.997,99.06 112.268,99.06 v1(113.411,97.917)
PB13-Y6: J6.6 U1.34 | length 34
  Top Layer w0.203: U1.34 111.454,96.849 v1(112.522,97.917)
  Bottom Layer w0.203: J6.6 86.5,98.311 86.5,99.135 87.187,99.822 101.154,99.822 104.329,96.647 107.634,96.647 108.077,97.09 108.077,97.601 109.155,98.679 111.76,98.679 v1(112.522,97.917)
PB14-Y7: J6.7 U1.35 | length 34.9
  Top Layer w0.203: U1.35 110.954,97.238 v1(111.633,97.917)
  Bottom Layer w0.203: J6.7 86.5,95.771 86.5,96.856 86.881,97.237 86.881,98.977 87.345,99.441 100.996,99.441 104.171,96.266 107.792,96.266 108.458,96.932 108.458,97.444 109.282,98.267 111.283,98.267 v1(111.633,97.917)
PB15-Y8: J6.8 U1.36 | length 34.8
  Top Layer w0.203: v1(110.363,97.536) 110.454,97.445 U1.36
  Bottom Layer w0.203: J6.8 85.852,93.667 86.881,94.697 86.881,96.698 87.262,97.079 87.262,98.819 87.503,99.06 100.838,99.06 104.013,95.885 107.95,95.885 108.839,96.774 108.839,97.282 109.093,97.536 v1(110.363,97.536)
PC0-X19: J3.3 U1.8 | length 25.1
  Top Layer w0.203: J3.3 94.501,73.038 106.693,73.038 106.934,73.279 106.934,73.371 107.823,74.26 107.823,82.388 107.954,82.519 U1.8
PC1-X20: J3.4 U1.9 | length 24.9
  Top Layer w0.203: J3.4 97.155,70.866 106.68,70.866 107.315,71.501 107.315,73.214 108.204,74.103 108.204,82.231 108.454,82.481 U1.9
PC2-X21: J3.5 U1.10 | length 24.5
  Top Layer w0.203: v1(99.822,69.85) 99.822,69.723 100.584,70.485 106.838,70.485 107.696,71.343 107.696,73.056 108.585,73.945 108.585,82.073 108.954,82.442 U1.10
  Bottom Layer w0.203: J3.5 98.552,71.12 v1(99.822,69.85)
PC3-X22: J3.6 U1.11 | length 22.2
  Top Layer w0.203: v1(102.489,69.85) 106.742,69.85 108.077,71.185 108.077,72.898 108.966,73.787 108.966,81.915 109.454,82.403 U1.11
  Bottom Layer w0.203: J3.6 101.092,71.247 v1(102.489,69.85)
PC4-X11: J2.3 U1.24 | length 36.3
  Top Layer w0.203: v1(111.252,89.154) 111.383,89.285 U1.24
  Bottom Layer w0.203: J2.3 84.836,83.693 84.836,83.101 84.823,83.087 84.823,81.547 85.471,80.899 88.169,80.899 88.55,81.28 101.123,81.28 108.997,89.154 v1(111.252,89.154)
PC5-X12: J2.4 U1.25 | length 32.2
  Top Layer w0.203: v1(111.252,90.17) 111.637,89.785 U1.25
  Bottom Layer w0.203: J2.4 86.741,81.28 88.011,81.28 88.392,81.661 100.965,81.661 109.474,90.17 v1(111.252,90.17)
PC6-Y1: J6.1 U1.37 | length 32.2
  Top Layer w0.203: J6.1 88.011,108.204 95.25,108.204 100.584,102.87 105.191,102.87 109.291,98.769 109.291,98.003 109.601,97.694 109.601,96.901 109.954,96.548 U1.37
PC7-Y2: J6.2 U1.38 | length 30.6
  Top Layer w0.203: J6.2 95.092,107.823 100.426,102.489 105.033,102.489 108.91,98.611 108.91,97.846 109.22,97.536 109.22,96.743 109.454,96.509 U1.38
PC8-SDIO_D0: J8.7 U1.39 | length 14.3
  Top Layer w0.203: J8.7@100.711,100.076 100.711,101.219 101.6,102.108 104.875,102.108 108.529,98.454 108.529,97.688 108.839,97.378 108.839,96.585 108.954,96.47 U1.39
PC9-SDIO_D1: J8.8 U1.40 | length 12.4
  Top Layer w0.203: J8.8 101.854,100.117 101.854,101.346 102.235,101.727 104.717,101.727 108.148,98.296 108.148,97.53 108.454,97.224 U1.40
PC10-SDIO_D2: J8.1 U1.51 | length 21.7
  Top Layer w0.203: v1(89.662,97.663) 90.551,98.552 92.964,98.552 94.143,99.731 J8.1 ; v1(98.933,92.71) 99.822,92.71 100.247,92.285 U1.51
  Bottom Layer w0.203: v1(89.662,97.663) 89.662,96.297 91.471,94.488 96.52,94.488 98.298,92.71 v1(98.933,92.71)
PC11-SDIO_D3: J8.2 R13.1 U1.52 | length 32.1
  Top Layer w0.203: v1(88.9,97.155) 88.9,97.79 90.043,98.933 92.741,98.933 93.218,99.41 93.218,101.442 93.503,101.727 94.996,101.727 95.25,101.473 J8.2@95.25,100.076 ; R13.1@92.71,97.155 92.71,97.663 93.345,98.298 94.234,98.298 95.243,99.307 J8.2 ; v1(99.568,91.948) 99.731,91.785 U1.52
  Bottom Layer w0.203: v1(88.9,97.155) 88.9,96.52 91.313,94.107 96.362,94.107 98.521,91.948 v1(99.568,91.948)
PC12-SDIO_CK: J8.5 U1.53 | length 12.9
  Top Layer w0.203: J8.5 98.543,98.67 98.044,98.171 98.044,94.869 98.298,94.615 98.298,92.233 99.246,91.285 U1.53
PC13-X18: J3.2 U1.2 | length 30
  Top Layer w0.203: J3.2 92.075,73.152 93.726,73.152 93.993,73.419 99.327,73.419 99.822,73.914 99.822,75.057 99.301,75.578 97.65,75.578 96.139,77.089 96.139,81.142 96.658,81.661 100.361,81.661 100.996,82.296 104.394,82.296 104.954,82.856 U1.2
PD2-SDIO_CMD: J8.3 U1.54 | length 30.7
  Top Layer w0.203: v1(88.138,96.647) 88.138,97.567 89.885,99.314 92.583,99.314 92.837,99.568 92.837,101.6 93.345,102.108 95.758,102.108 96.343,101.523 J8.3 ; v1(96.901,92.71) 97.282,92.71 99.207,90.785 U1.54
  Bottom Layer w0.203: v1(88.138,96.647) 91.059,93.726 95.885,93.726 v1(96.901,92.71)
RST#: C13.2 J2.5 J7.5 R3.1 SW1.2 U1.7 | length 62.5
  Top Layer w0.203: J2.5 86.614,78.867 C13.2 ; U1.7 v1@107.454,85.967 ; SW1.2@119.126,99.314 119.126,96.749 R3.1 ; SW1.2@119.482,99.035 119.761,99.314 120.777,99.314 121.272,99.809 121.272,100.825 122.301,101.854 J7.5
  Bottom Layer w0.203: J2.5 86.741,80.518 88.327,80.518 88.708,80.899 101.281,80.899 106.361,85.979 v1(107.442,85.979) 110.617,85.979 120.396,95.758 120.396,96.074 120.904,96.582 120.904,97.065 120.891,97.079 120.891,100.248 122.301,101.659 J7.5
VBAT: C8.2 R19.1 U1.1 | length 13
  Top Layer w0.203: R19.1@95.123,78.867 95.123,80.665 96.5,82.042 100.203,82.042 100.838,82.677 104.14,82.677 104.454,82.991 U1.1
VBATIN: J4.6 R19.2 | length 10.7
  Top Layer w0.203: R19.2@93.345,78.867 93.345,77.851 93.98,77.216 v1(94.615,77.216)
  Bottom Layer w0.203: v1(94.615,77.216) 94.615,76.327 95.25,75.692 99.949,75.692 J4.6
VBUS: D1.1 J9.1 R10.2 | length 8.2
  Top Layer w0.305: J9.1 112.044,105.507 D1.1 114.808,103.378 116.078,104.648 R10.2@116.078,106.172
VIN: C16.2 D1.2 J2.8 J4.7 J4.8 J7.8 pad.0@104.902,74.549 U2.3 | length 102.8
  Top Layer w0.305: v1@109.365,71.646 U2.3 C16.2@114.282,71.646 ; v1(115.443,69.85) 122.301,69.85 123.571,71.12 123.571,93.472 123.952,93.853 123.952,108.712 J7.8 121.031,109.093 121.031,108.204 120.523,107.696 120.523,105.156 D1.2@118.745,103.378
  Bottom Layer w0.305: J2.8 87.376,70.485 96.52,70.485 97.282,71.247 97.282,72.267 98.167,73.152 102.235,73.152 ; J4.7 102.235,73.152 ; J4.8 109.093,71.628 v1(109.347,71.628) ; v1(115.443,69.85) 115.24,69.647 104.216,69.647 102.235,71.628 102.235,73.152
pads on no net: J9.
copper on no net:
  other v2: 93.343,110.606 101.343,110.606

## Polygon pours and split planes (outlines as drawn)
GND on Top Layer "Top Layer-No Net" (hatched 45Degree grid 0.508 track 0.254, remove dead copper, pour order 2): 82.423,111.633 82.423,68.707 125.73,68.707 125.603,68.834 125.603,111.76
GND on Bottom Layer "Top Layer-No Net" (hatched 45Degree grid 0.508 track 0.254, remove dead copper, pour order 4): 82.55,68.58 125.73,68.58 125.73,111.633 82.55,111.633

## Keep-outs
Keep-Out Layer:
  the board outline again, w0.203

## Other copper
Bottom Layer:
  text "ShaoZiYang" at 98.298,96.774 h0.64

## Silkscreen, mask and mechanical layers (free items; w line width, h text height)
Top Overlay:
  drawing of 521 lines, arcs and shapes, not listed
  text "Y1" at 83.312,110.363 h0.76 r270
  text "VIN" at 124.841,108.839 h0.76 r90
  text "Y2" at 83.312,108.585 h0.76 r270
  text "3V3" at 124.841,106.553 h0.76 r90
  text "Y3" at 83.312,105.918 h0.76 r270
  text "GND" at 124.841,104.14 h0.76 r90
  text "Y4" at 83.312,103.251 h0.76 r270
  text "RST" at 124.841,101.6 h0.76 r90
  text "Y5" at 83.312,100.584 h0.76 r270
  text "Y12" at 124.841,99.06 h0.76 r90
  text "RST" at 107.569,98.806 h1.14
  text "Y6" at 83.312,98.171 h0.76 r270
  text "Y11" at 124.841,96.774 h0.76 r90
  text "Y7" at 83.312,95.631 h0.76 r270
  text "Y10" at 124.841,94.107 h0.76 r90
  text "Y8" at 83.312,93.091 h0.76 r270
  text "Y9" at 124.841,91.821 h0.76 r90
  text "X9" at 83.312,90.424 h0.76 r270
  text "SW" at 91.567,90.424 h1.14
  text "X8" at 124.841,89.154 h0.76 r90
  text "X10" at 83.312,88.138 h0.76 r270
  text "X7" at 124.841,86.614 h0.76 r90
  text "X11" at 83.312,85.471 h0.76 r270
  text "X6" at 124.841,84.074 h0.76 r90
  text "Maker" at 115.824,83.566 h1.02
  text "X12" at 83.312,82.931 h0.76 r270
  text "X5" at 124.841,81.661 h0.76 r90
  text "EEWORLD" at 112.776,81.534 h1.14
  text "RST" at 83.312,80.391 h0.76 r270
  text "X4" at 124.841,79.121 h0.76 r90
  text "GND" at 83.312,77.978 h0.76 r270
  text "X3" at 124.841,76.454 h0.76 r90
  text "*" at 119.253,76.073 h0.76
  text "3V3" at 83.312,75.438 h0.76 r270
  text "X2" at 124.841,73.787 h0.76 r90
  text "VIN" at 83.312,72.898 h0.76 r270
  text "X1" at 124.841,71.501 h0.76 r90
  text "pyBoard" at 108.966,69.723 h1.07
  text "X16" at 84.836,69.469 h0.76
  text "X17" at 87.503,69.469 h0.76
  text "X18" at 89.916,69.469 h0.76
  text "X19" at 92.456,69.469 h0.76
  text "X20" at 94.996,69.469 h0.76
  text "X21" at 97.663,69.469 h0.76
  text "X22" at 100.076,69.469 h0.76
  text "X23" at 102.87,69.469 h0.76
  text "X24" at 105.41,69.469 h0.76
  text "GND" at 115.951,69.469 h0.76
  text "3V3*" at 118.618,69.469 h0.76
Bottom Overlay:
  drawing of 4361 lines, arcs and shapes, not listed
  text "VIN" at 124.841,110.744 h0.76 r90
  text "C6" at 83.312,109.093 h0.76 r270
  text "TX/PWM" at 95.504,108.712 h1.27
  text "3V3" at 124.841,108.585 h0.76 r90
  text "OTG" at 112.522,108.204 h1.27
  text "PWM" at 101.092,108.077 h1.27
  text "C7" at 83.312,107.061 h0.76 r270
  text "RX/PWM" at 95.504,107.061 h1.27
  text "GND" at 124.841,106.172 h0.76 r90
  text "PWM" at 91.694,104.775 h1.27
  text "B8" at 83.312,104.648 h0.76 r270
  text "RST" at 124.841,103.505 h0.76 r90
  text "PYB v1.0" at 109.855,102.997 h1.52
  text "PWM" at 91.694,102.108 h1.27
  text "B9" at 83.312,101.981 h0.76 r270
  text "B1" at 124.841,100.711 h0.76 r90
  text "SS" at 90.424,99.695 h1.27
  text "ADC" at 120.142,99.568 h1.27
  text "B12" at 83.312,99.06 h0.76 r270
  text "B0" at 124.841,98.298 h0.76 r90
  text "SCK" at 91.694,97.155 h1.27
  text "ADC" at 120.142,97.155 h1.27
  text "B13" at 83.312,96.52 h0.76 r270
  text "B11" at 124.841,96.012 h0.76 r90
  text "MISO" at 92.583,94.488 h1.27
  text "SDA/RX" at 120.142,94.488 h1.27
  text "B14" at 83.312,93.98 h0.76 r270
  text "B10" at 124.841,93.345 h0.76 r90
  text "MOSI" at 92.583,91.948 h1.27
  text "SCL/TX" at 120.142,91.948 h1.27
  text "B15" at 83.312,91.567 h0.76 r270
  text "A7" at 124.841,90.424 h0.76 r90
  text "B6" at 83.312,89.154 h0.76 r270
  text "TX/SCL" at 95.504,89.154 h1.27
  text "MOSI" at 120.015,89.154 h1.27
  text "A6" at 124.841,87.884 h0.76 r90
  text "RX/SDA" at 95.504,87.122 h1.27
  text "MISO" at 120.015,86.614 h1.27
  text "B7" at 83.312,86.487 h0.76 r270
  text "A5" at 124.841,85.344 h0.76 r90
  text "ADC" at 91.821,84.201 h1.27
  text "SCK" at 120.015,84.201 h1.27
  text "C4" at 83.312,84.074 h0.76 r270
  text "A4" at 124.841,82.804 h0.76 r90
  text "SS" at 119.888,81.661 h1.27
  text "C5" at 83.312,81.407 h0.76 r270
  text "ADC" at 91.821,81.28 h1.27
  text "2016.3" at 103.759,81.026 h1.02
  text "A3" at 124.841,80.264 h0.76 r90
  text "PWM" at 119.888,79.248 h1.27
  text "RST" at 83.312,78.359 h0.76 r270
  text "A2" at 124.841,77.724 h0.76 r90
  text "PWM" at 119.888,77.47 h1.27
  text "GND" at 83.312,75.946 h0.76 r270
  text "DFU" at 87.884,75.946 h1.02 r270
  text "BLUE" at 90.424,75.946 h1.02 r270
  text "YEL" at 92.964,75.946 h1.02 r270
  text "GREEN" at 95.504,75.946 h1.02 r270
  text "RED" at 98.044,75.946 h1.02 r270
  text "VBAT" at 100.457,75.946 h1.02 r270
  text "VIN*" at 103.124,75.946 h1.02 r270
  text "VIN*" at 105.664,75.946 h1.02 r270
  text "*" at 105.283,75.438 h0.76 r90
  text "A1" at 124.841,75.057 h0.76 r90
  text "*" at 120.523,73.533 h0.76 r90
  text "3V3" at 83.312,73.406 h0.76 r270
  text "B4" at 91.567,72.898 h0.76
  text "A15" at 94.361,72.898 h0.76
  text "A14" at 96.901,72.898 h0.76
  text "A13" at 99.441,72.898 h0.76
  text "A0" at 124.841,72.644 h0.76 r90
  text "VIN" at 83.312,70.993 h0.76 r270
  text "B3" at 89.154,69.469 h0.76
  text "C13" at 91.821,69.469 h0.76
  text "C0" at 94.107,69.469 h0.76
  text "C1" at 96.393,69.469 h0.76
  text "C2" at 99.187,69.469 h0.76
  text "C3" at 101.854,69.469 h0.76
  text "A3V3" at 105.791,69.469 h0.76
  text "AGND" at 109.22,69.469 h0.76
  text "GND" at 117.983,69.469 h0.76
  text "3V3*" at 121.412,69.469 h0.76